# EAGLE board adafruit-flora-mainboard-2 (EAGLE 6.6.0)
REV: B
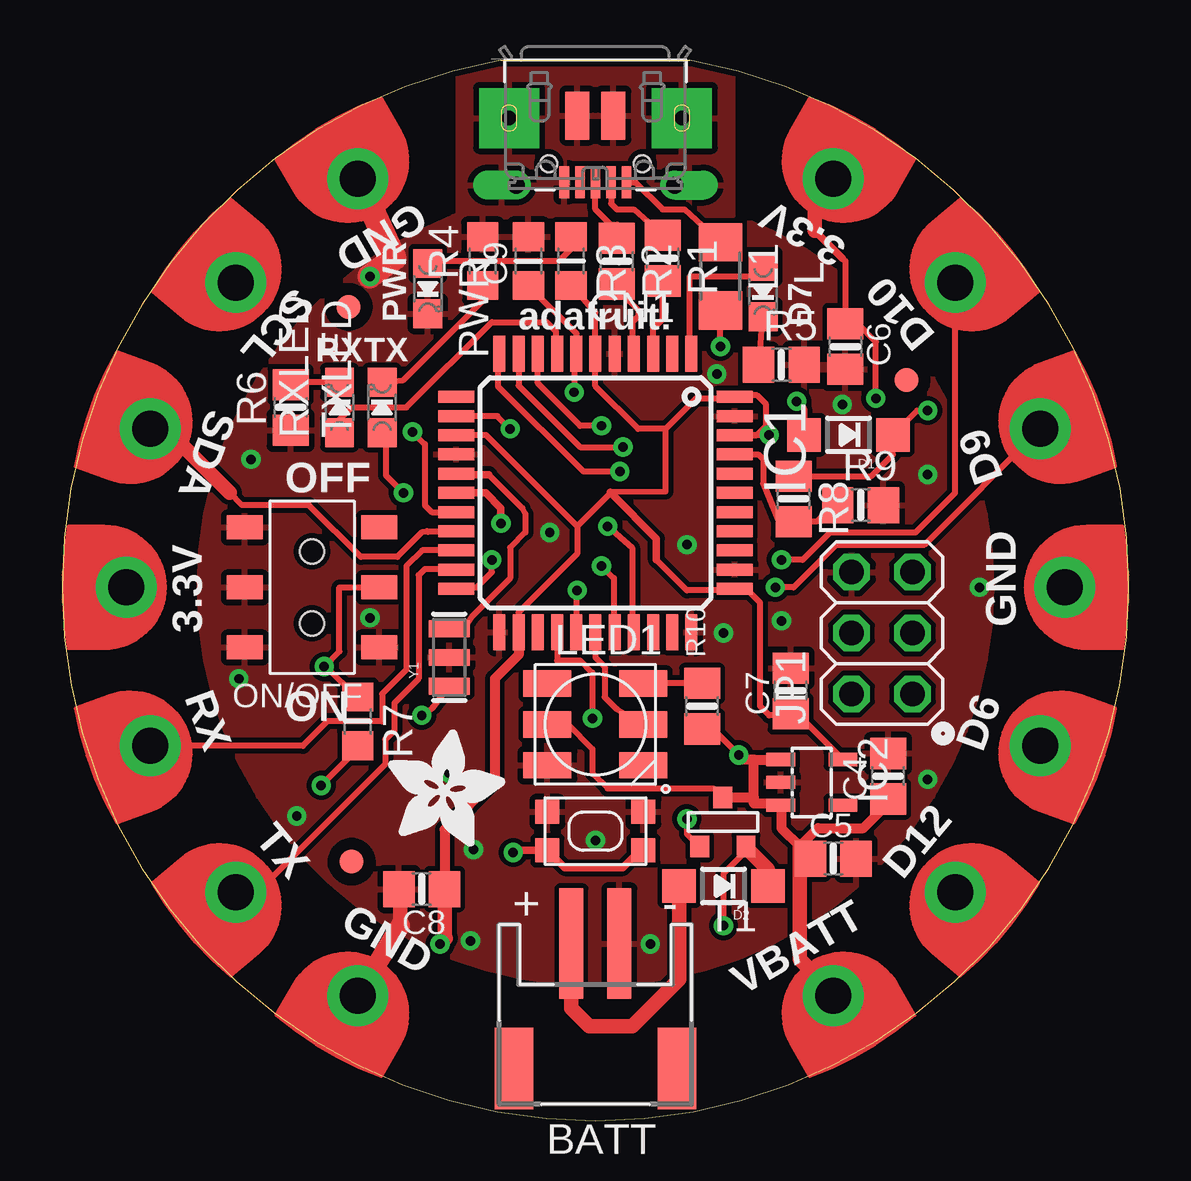
[diagram p0: board, top side]
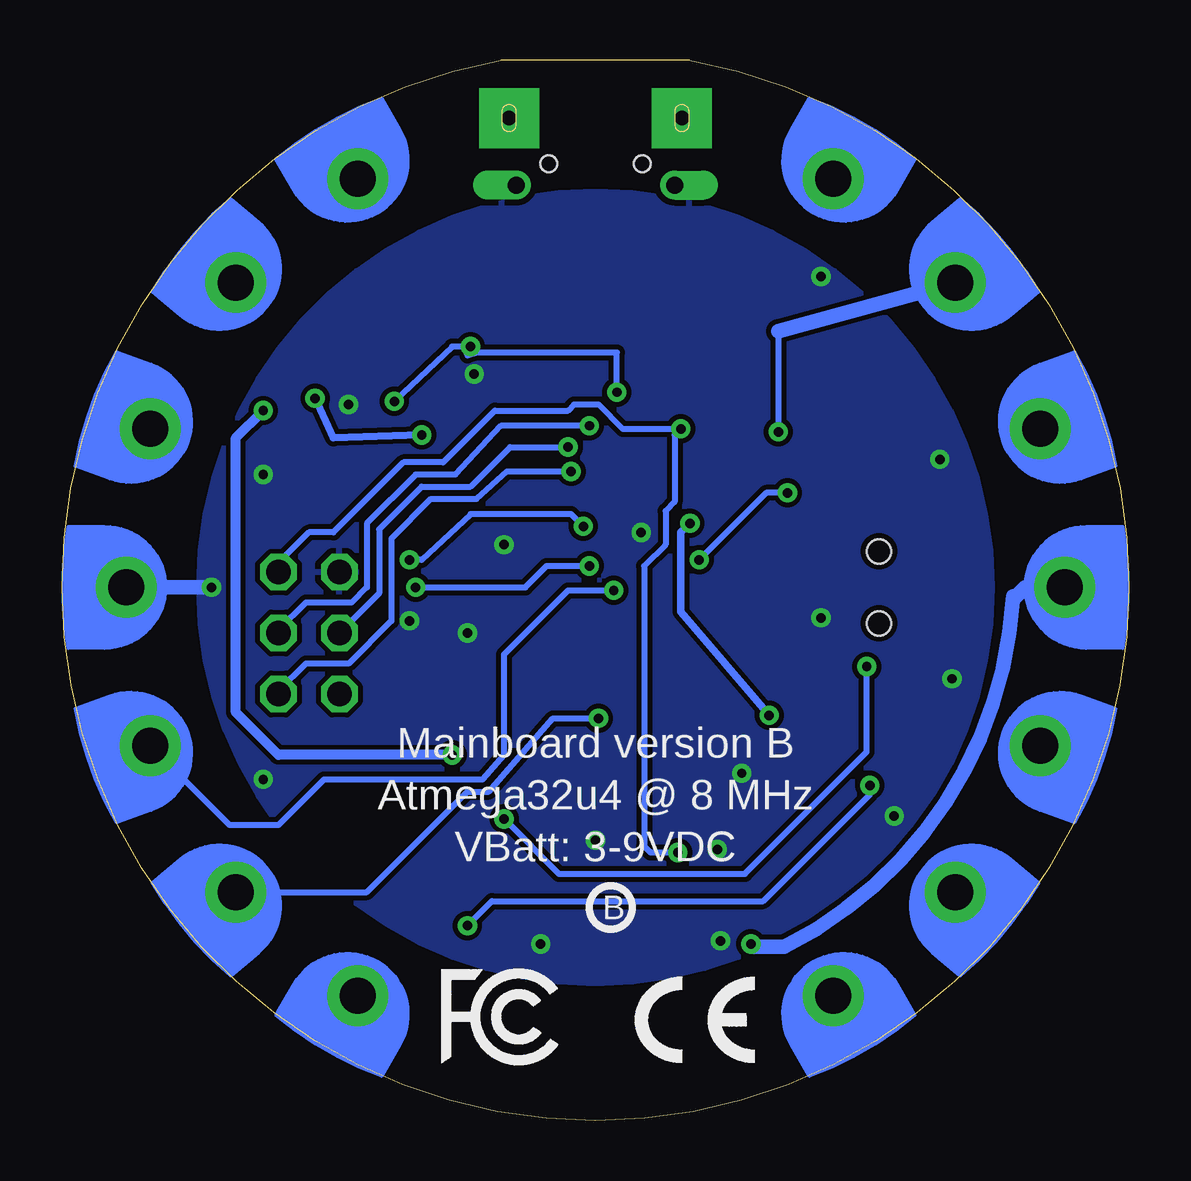
[diagram p1: board, bottom side, seen from below]

Size 44.45 x 44.2 mm. Coordinates in mm from the lower left corner, seen from the top.
Outline: 0,22.23 arc90 22.23,0 arc90 44.45,22.23 arc80 26.16,44.2 18.29,44.2 arc80 0,22.23
Copper layers (1*16): Top 0.035mm / dielectric 1.5mm / Bottom 0.035mm
Design rules "adafruit": minimum track width 8mil, minimum drill 15.5mil, track to track 8mil, track to pad 8mil, pad to pad 8mil, via to via 8mil, smd to smd 8mil, copper to edge 10mil, drill to drill 8mil, minimum pad ring 10mil, minimum via ring 8mil, stop-mask expansion 2mil, vias tented up to drill 20mil, thermal gap 10mil

## Footprints (pad centres in the part's own frame; a part is rotated, then mirrored left to right if it is on the bottom)
SEWINGTAP_2.0 = drill 1.5 pad 2.54: P$1 0,0
JST-PH-2-SMT-RA = smd 1 x 4.6: 1 1,-3.7; 2 -1,-3.7 | smd 1.6 x 3.4: NC1 -3.4,1.5; NC2 3.4,1.5
KMR2 = smd 1 x 1: 1 2,0.8; 2 2,-0.8; 3 -2,0.8; 4 -2,-0.8
0805-NO = smd 1.3 x 1.5: 1 -0.95,0; 2 0.95,0
_0805MP = smd 1.2 x 1.3: 1 -1.016,0; 2 1.016,0
4UCONN_20329 = smd 1 x 2: BASE@1 -0.75,-2; BASE@2 0.75,-2 | smd 0.4 x 1.35: D+ 0,0.775; D- -0.65,0.775; GND 1.3,0.775; ID 0.65,0.775; VBUS -1.3,0.775 | drill 0.7 offset: SPRT@1 -3.3,0.9; SPRT@2 3.3,0.9 | drill 0.6 pad 2.5 square: SPRT@3 -3.6,-1.9; SPRT@4 3.6,-1.9 | hole 0.7: -1.95,0; 1.95,0
SOD-123 = smd 1.4 x 1.4: A 1.85,0; C -1.85,0
TQFP44 = smd 1.5 x 0.5: 1 -5.8,4; 2 -5.8,3.2; 3 -5.8,2.4; 4 -5.8,1.6; 5 -5.8,0.8; 6 -5.8,0; 7 -5.8,-0.8; 8 -5.8,-1.6; 9 -5.8,-2.4; 10 -5.8,-3.2; 11 -5.8,-4; 23 5.8,-4; 24 5.8,-3.2; 25 5.8,-2.4; 26 5.8,-1.6; 27 5.8,-0.8; 28 5.8,0; 29 5.8,0.8; 30 5.8,1.6; 31 5.8,2.4; 32 5.8,3.2; 33 5.8,4 | smd 0.5 x 1.5: 12 -4,-5.8; 13 -3.2,-5.8; 14 -2.4,-5.8; 15 -1.6,-5.8; 16 -0.8,-5.8; 17 0,-5.8; 18 0.8,-5.8; 19 1.6,-5.8; 20 2.4,-5.8; 21 3.2,-5.8; 22 4,-5.8; 34 4,5.8; 35 3.2,5.8; 36 2.4,5.8; 37 1.6,5.8; 38 0.8,5.8; 39 0,5.8; 40 -0.8,5.8; 41 -1.6,5.8; 42 -2.4,5.8; 43 -3.2,5.8; 44 -4,5.8
SOT23-5L = smd 0.55 x 1.2: 1 -0.95,-1.3; 2 0,-1.3; 3 0.95,-1.3; 4 0.95,1.3; 5 -0.95,1.3
2X03 = drill 1.016 octagon: 1 -2.54,-1.27; 2 -2.54,1.27; 3 0,-1.27; 4 0,1.27; 5 2.54,-1.27; 6 2.54,1.27
CHIPLED_0805_NOOUTLINE = smd 1.2 x 1.2: A 0,-1.05; C 0,1.05
R1206 = smd 1.6 x 1.803: 1 -1.422,0; 2 1.422,0
WS2812 = smd 2 x 1.1: DI 2,0; DO 2,-1.7; LEDVDD -2,0; NC -2,1.7; VDD 2,1.7; VSS -2,-1.7
EG1390 = smd 1 x 1.5: O1 -2.5,2.8; O2 -2.5,-2.8; P1 0,2.8; P2 0,-2.8; S1 2.5,2.8; S2 2.5,-2.8 | hole 1: 1.5,0; -1.5,0
SOT-23 = smd 0.787 x 0.889: 1 0.025,-1.016; 2 -0.94,1.016; 3 0.991,1.016
FIDUCIAL_1MM = smd 1 x 1: 1 0,0
RESONATOR-SMD = smd 0.7 x 1.7: 1 -1.2,0; 2 0,0; 3 1.2,0

## Placement (x,y rotation side)
3.3VTAP  SEWTAP-2.0IN  [SEWINGTAP_2.0]  2.67,22.23 90 top
3V3TAP2  SEWTAP-2.0IN  [SEWINGTAP_2.0]  32.13,39.24 330 top
BATT  3-9VDC  [JST-PH-2-SMT-RA]  22.23,3.68 180 top
BOOT  SPST_TACT-KMR2  [KMR2]  22.23,12.07 180 top
C4  10uF  [0805-NO]  34.42,14.35 90 top
C5  10uF  [0805-NO]  32.13,10.92 0 top
C6  10uF  [0805-NO]  32.64,32.26 270 top
C7  10uF  [0805-NO]  30.35,17.91 90 top
C8  10uF  [0805-NO]  14.99,9.65 180 top
C9  10uF  [_0805MP]  19.43,35.81 90 top
CN1  MiniB USB  [4UCONN_20329]  22.23,39.88 180 top
D1  SCHOTTKY  [SOD-123]  32.77,28.58 180 top
D2  SCHOTTKY  [SOD-123]  27.56,9.78 180 top
D6  SEWTAP-2.0IN  [SEWINGTAP_2.0]  40.77,15.62 250 top
GND3TAP  SEWTAP-2.0IN  [SEWINGTAP_2.0]  12.32,39.24 30 top
GNDTAP  SEWTAP-2.0IN  [SEWINGTAP_2.0]  41.78,22.23 270 top
GNDTAP2  SEWTAP-2.0IN  [SEWINGTAP_2.0]  12.32,5.21 150 top
IC1  ATMEGA32U4-AU  [TQFP44]  22.23,26.16 270 top
IC2  MIC5225-3.3V  [SOT23-5L]  31.24,14.1 270 top
IO9  SEWTAP-2.0IN  [SEWINGTAP_2.0]  40.77,28.83 290 top
IO10  SEWTAP-2.0IN  [SEWINGTAP_2.0]  37.21,34.92 310 top
IO12  SEWTAP-2.0IN  [SEWINGTAP_2.0]  37.21,9.53 230 top
JP1  ICSP  [2X03]  34.16,20.32 90 top
L  RED  [CHIPLED_0805_NOOUTLINE]  29.21,34.54 180 top
L1  500mA  [R1206]  27.43,35.18 270 top
LED1  WS2812  [WS2812]  22.23,16.51 0 top
ON/OFF  EG1390  [EG1390]  10.41,22.23 90 top
PWR  GREEN  [CHIPLED_0805_NOOUTLINE]  15.24,34.67 180 top
R1  22  [0805-NO]  25.02,35.94 270 top
R2  22  [0805-NO]  23.11,35.81 270 top
R3  1K  [_0805MP]  21.21,35.81 270 top
R4  1K  [_0805MP]  17.53,35.81 90 top
R5  1K  [0805-NO]  29.97,31.5 0 top
R6  1K  [0805-NO]  9.53,29.72 90 top
R7  10K  [_0805MP]  12.32,16.64 270 top
R8  150K  [0805-NO]  30.48,25.91 270 top
R9  10K  [0805-NO]  33.27,25.65 0 top
R10  2.2K  [0805-NO]  26.67,17.27 90 top
RX  SEWTAP-2.0IN  [SEWINGTAP_2.0]  3.68,15.62 110 top
RXLED  YELLOW  [CHIPLED_0805_NOOUTLINE]  11.56,29.72 0 top
SCL  SEWTAP-2.0IN  [SEWINGTAP_2.0]  7.24,34.92 50 top
SDA  SEWTAP-2.0IN  [SEWINGTAP_2.0]  3.68,28.83 70 top
T1  DMG3415  [SOT-23]  27.56,12.45 180 top
TX  SEWTAP-2.0IN  [SEWINGTAP_2.0]  7.24,9.53 130 top
TXLED  YELLOW  [CHIPLED_0805_NOOUTLINE]  13.34,29.72 0 top
U$1  [ADAFRUIT_5MM]  13.59,11.43 0 top
U$2  FIDUCIAL""  [FIDUCIAL_1MM]  12.07,10.8 0 top
U$3  FIDUCIAL""  [FIDUCIAL_1MM]  11.94,33.91 0 top
U$4  [FLORAMED]  33.91,24.13 0 bottom
U$5  [PCBFEAT-REV-040]  21.59,8.89 0 bottom
U$6  FIDUCIAL""  [FIDUCIAL_1MM]  35.18,30.86 0 top
U$7  [SYMBOL_FCC_5MM]  28.7,2.29 0 bottom
U$8  [SYMBOL_CE_5MM]  20.57,2.41 0 bottom
VCC2  SEWTAP-2.0IN  [SEWINGTAP_2.0]  32.13,5.21 210 top
Y1  8MHz  [RESONATOR-SMD]  16.13,19.3 90 top

## Library data of the parts
3.3VTAP 3V3TAP2 BATT BOOT D6 GND3TAP GNDTAP GNDTAP2 IC2 IO9 IO10 IO12 L1 LED1 ON/OFF RX SCL SDA TX VCC2 = adafruit
C4-C9 CN1 D1 D2 L PWR R1-R10 RXLED TXLED U$1 U$5 U$7 U$8 = microbuilder
IC1 = adaprog
JP1 = pinhead
T1 = zetex; OC_FARNELL: unknown; OC_NEWARK: unknown
U$2 U$3 U$6 = microbuilder; BOM: EXCLUDE
U$4 = flora
Y1 = SparkFun

## Nets
+3V3: 3.3VTAP.P$1 3V3TAP2.P$1 C6.1 C7.1 C8.1 IC1.6 IC1.14 IC1.24 IC1.34 IC1.42 IC1.44 IC2.5 R3.2
+5V: C9.1 D1.A IC1.7 L1.2
A5: IC1.41 R8.2 R9.1
D0/RX: IC1.20 RX.P$1
D1/TX: IC1.21 TX.P$1
D6*: D6.P$1 IC1.27
D7: IC1.1 L.A
GND: BATT.2 BOOT.2 BOOT.4 C4.2 C5.2 C6.2 C7.2 C8.2 C9.2 CN1.BASE@1 CN1.BASE@2 CN1.GND CN1.SPRT@1 CN1.SPRT@2 CN1.SPRT@3 CN1.SPRT@4 GND3TAP.P$1 GNDTAP2.P$1 GNDTAP.P$1 IC1.5 IC1.15 IC1.23 IC1.33 IC1.35 IC1.43 IC2.2 JP1.6 LED1.VSS ON/OFF.O1 ON/OFF.O2 ON/OFF.P1 ON/OFF.S1 PWR.C R4.2 R5.2 R6.1 R9.2 Y1.2
IO9*: IC1.29 IO9.P$1
IO10*: IC1.30 IO10.P$1
IO12*: IC1.26 IO12.P$1
MISO: IC1.11 JP1.1
MOSI: IC1.10 JP1.4
N$1: PWR.A R3.1
N$2: CN1.D+ R2.1
N$3: IC1.3 R1.2
N$4: IC1.4 R2.2
N$5: CN1.D- R1.1
N$6: D2.C R7.2 T1.2
N$7: BATT.1 D2.A
N$8: IC1.17 Y1.1
N$9: IC1.16 Y1.3
N$10: L.C R5.1
N$11: R4.1 TXLED.C
N$12: R6.2 RXLED.C
N$13: ON/OFF.P2 R7.1 T1.3
N$14: LED1.VDD R10.2
N$15: IC1.25
NEOPIX: IC1.28 LED1.DI
PC6: IC1.31
PC7: IC1.32
PD0: IC1.18 SCL.P$1
PD1: IC1.19 SDA.P$1
RST: BOOT.1 BOOT.3 IC1.13 JP1.5
RXLED/SS: IC1.8 RXLED.A
SCK: IC1.9 JP1.3
TXLED: IC1.22 TXLED.A
VBUS: CN1.VBUS L1.1
VCC: C4.1 C5.1 D1.C IC2.1 IC2.3 LED1.LEDVDD R8.1 R10.1 T1.1 VCC2.P$1

## Tracks (layer width: path | path; a pad name or v marks a point on that pad's centre or on a via)
+3V3  (via drill 0.39)
  Top 0.254: IC1.14 17.67,28.56 21.46,24.77 | IC1.24 19.03,21.18 21.46,23.62 21.46,24.77 | 24.77,23.37 26.04,22.1 28.07,22.1 | 28.07,22.1 28.03,22.14 IC1.34 | 28.07,22.1 28.07,22.12 IC1.34 | 25.15,28.83 24,28.83 22.23,30.61 IC1.6 22.23,33.67 21.35,34.67 21.35,34.78 R3.2 | 25.15,28.83 26.42,30.1 28.07,30.1 28.07,30.12 IC1.44 28.09,30.23 28.96,30.23 29.34,29.85 29.34,28.96 28.94,28.56 IC1.42 28.04,28.58 v29.46,28.58 | 25.15,28.83 25.15,26.21 22.84,26.19 | 32.51,35.94 32.64,35.81 C6.1 33.15,33.21 33.91,32.45 v33.91,30.1 | 28.07,22.1 28.19,22.1 28.32,22.23 | IC2.5 30.63,16.96 C7.1 | 21.46,24.77 22.8,26.1 22.92,26.1 | 30.35,16.89 29.46,16.89 29.08,17.27 29.08,21.59 28.58,22.1 28.09,22.1 IC1.34
  Top 0.305: 22.84,26.19 22.92,26.1 24.77,24.26 24.77,23.37 | 32.51,35.94 31.37,37.08
  Top 0.406: 30.35,16.89 C7.1 | IC1.24 19.03,19.41 18.03,18.42 18.03,14.22 15.94,12.13 C8.1
  Top 0.61: 3V3TAP2.P$1 31.37,38.48 31.37,37.08 | 16,9.78 16,9.65 C8.1 15.94,7.65 15.99,7.6 v15.75,7.37
  Bottom 0.305: v29.46,28.58 33.15,28.45 v33.91,30.1
  Bottom 0.61: 3.3VTAP.P$1 4.32,22.23 4.83,21.72 4.83,21.84 arc60 14.35,7.24 15.75,7.24 v15.75,7.37
+5V  (via drill 0.39)
  Top 0.254: v27.43,32.26 L1.2 | v21.34,30.35 21.34,31.96 IC1.7 21.43,32.8 C9.1 | 30.61,28.83 D1.A 30.92,29.66 v30.61,29.97
  Bottom 0.254: v21.34,30.35 21.34,32 27.18,32 27.56,31.88 v27.43,32.26 28.19,32.26 v30.61,29.97
A5
  Top 0.254: R9.1 32.13,25.65 31.44,24.96 R8.2 30.42,25.02 29.85,25.02 29.21,26.54 29.21,27.56 29.01,27.76 IC1.41
D0/RX
  Top 0.254: IC1.20 15,23.76 14.35,23.11 14.35,18.8 13.34,17.78 13.34,16.64 11.05,16.64 10.03,15.62 RX.P$1
  Top 0.61: 3.81,15.49 RX.P$1
D1/TX
  Top 0.254: IC1.21 16.41,22.96 16.38,22.99 15.11,22.99 14.86,22.73 14.86,18.42 13.84,17.4 13.84,16.26 13.46,15.88 13.46,14.86 8.13,9.53 TX.P$1 | 8,10.54 8,10.29
  Top 0.61: 8,10.29 TX.P$1
D6*  (via drill 0.39)
  Top 0.254: IC1.27 21.43,22.14 v21.46,22.1
  Bottom 0.254: v21.46,22.1 23.37,22.1 26.04,19.43 26.04,15.24 26.92,14.22 33.53,14.22 35.43,12.32 37.47,12.32 D6.P$1 40.89,15.62
D7
  Top 0.254: IC1.1 26.18,32 26.16,32 26.16,35.18 28.83,35.18 L.A
GND  (via drill 0.39)
  Top 0.61: 14.1,8 14.1,8.13 14.1,9.65 C8.2 | GND3TAP.P$1 13.21,39.24
  Top 0.813: GNDTAP2.P$1 14.1,8.13
  Top 1.016: GND3TAP.P$1 13.84,35.94 v12.83,35.18
  Bottom 0.61: 38.48,22.23 GNDTAP.P$1
  other vias: 7.87,27.56 9.78,12.7 17.02,7.49 20.32,24.51 38.23,22.23 36.07,14.22 26.04,24 36.07,26.92 12.83,20.96 7.37,18.42 16.13,14.48 22.23,11.68 24.51,7.37 27.28,31.12 32.51,29.85 27.56,20.32 29.97,20.83 17.15,11.3
  pour Top: 22.23,5.71 arc90 38.73,22.23 arc90 22.23,38.73 arc90 5.71,22.23 arc90
  pour Bottom: 22.23,5.71 arc90 38.73,22.23 arc90 22.23,38.73 arc90 5.71,22.23 arc90
  pour Top: 16.51,44.07 16.51,37.72 27.94,37.72 27.94,44.07
IO9*  (via drill 0.39)
  Top 0.254: IO9.P$1 35.94,24 32.26,24 30.48,22.23 v29.72,22.23 | 22.99,20.45 23.11,20.19 | 22.99,20.45 IC1.29 | v22.48,23.11 22.99,22.61 22.99,20.45
  Bottom 0.254: v29.72,22.23 25.15,22.23 24.26,23.11 v22.48,23.11
IO10*  (via drill 0.39)
  Top 0.254: IO10.P$1 37.21,26.16 35.56,24.51 32,24.51 30.86,23.37 v29.97,23.37 | IC1.30 23.75,20.44 23.75,23.88 v22.73,24.77
  Bottom 0.254: v22.73,24.77 23.24,25.27 27.43,25.27 29.46,23.37 v29.97,23.37
IO12*  (via drill 0.39)
  Top 0.254: IC1.26 20.62,19.18 21.59,19.18 22.1,18.67 v22.1,16.76
  Bottom 0.254: v22.1,16.76 24,16.76 26.67,13.72 27.56,13.72 31.75,9.53 IO12.P$1
MISO  (via drill 0.39)
  Top 0.254: IC1.11 18.18,32 18.16,32 18.16,30.61 21.72,27.05 v23.24,27.05
  Bottom 0.254: JP1.1 35.43,17.91 34.29,19.05 32.51,19.05 30.73,20.83 30.73,24.26 29.08,25.91 27.18,25.91 25.91,27.05 v23.24,27.05
MOSI  (via drill 0.39)
  Top 0.254: IC1.10 19.03,30.63 21.59,28.07 v23.37,28.07
  Bottom 0.254: JP1.4 31.24,21.97 31.24,24.64 29.46,26.42 27.43,26.42 25.78,28.07 v23.37,28.07
N$1
  Top 0.254: R3.1 21.21,36.32 20.7,35.81 15.4,35.81 PWR.A
N$2
  Top 0.254: CN1.D+ 22.23,37.97 22.86,37.34 23.11,37.34 R2.1
N$3
  Top 0.254: 24.62,34.72 R1.2 25.02,33.4 24.62,33.01 IC1.3
N$4
  Top 0.254: R2.2 23.37,34.61 23.37,34.42 24,33.78 24,33.53 23.75,33.27 23.75,32.04 IC1.4
N$5
  Top 0.254: R1.1 24.89,36.96 | 24.89,37.34 R1.1 | CN1.D- 22.88,38.21 23.11,37.97 23.81,37.97 R1.1
N$6  (via drill 0.39)
  Top 0.254: 27.56,9.91 27.53,9.91 | 27.56,9.91 v27.56,8.13 | 27.56,9.91 27.56,10.29 28.58,11.3 | v10.8,13.97 12.32,15.49 R7.2
  Top 0.61: 29.46,9.78 D2.C 29.41,10.47 28.58,11.3 28.5,11.38 T1.2
  Bottom 0.254: v27.56,8.13 26.54,9.14 15.24,9.14 10.8,13.59 v10.8,13.97
N$7
  Top 0.61: BATT.1 21.23,4.68 21.97,3.94 23.75,3.94 25.71,5.9 D2.A
N$8  (via drill 0.39)
  Top 0.254: v14.99,16.89 15.44,17.22 Y1.1
  Top 0.305: v18.29,24.89 18.29,25.53 17.65,26.16 IC1.17
  Bottom 0.305: v14.99,16.89 18.67,21.21 18.67,24.51 v18.29,24.89
N$9
  Top 0.254: 17.78,26.92 19.18,25.53 19.3,25.27 19.3,24.51 18.67,23.88 18.67,22.61 17.11,21.05 16.73,20.49 Y1.3
  Top 0.305: IC1.16 16.47,26.96 16.51,26.92 17.78,26.92
N$10
  Top 0.254: L.C 29.16,33.31 29.16,33.26 R5.1
N$11
  Top 0.254: 13.37,30.73 TXLED.C 14.22,30.86 17.53,34.16 R4.1
N$12
  Top 0.254: RXLED.C 9.56,30.77
  Top 0.305: R6.2 9.53,30.73 9.56,30.77
N$13  (via drill 0.39)
  Top 0.254: 12.7,22.23 11.56,22.23 11.56,19.56 v10.92,18.92 10.98,18.92 R7.1 | T1.3 26.54,11.43 26.04,11.94 v26.04,12.57
  Top 0.406: 12.7,22.23 ON/OFF.P2
  Bottom 0.254: v26.04,12.57 23.75,10.29 16,10.29 10.92,15.37 v10.92,18.92
N$14
  Top 0.254: R10.2 24.24,18.22 LED1.VDD
NEOPIX
  Top 0.254: IC1.28 22.23,19.3 22.61,18.92 22.61,17.65 23.11,17.15 LED1.DI
PD0  (via drill 0.39)
  Top 0.254: IC1.18 15.41,25.36 15.11,25.65 15.11,28.19 v14.61,28.7
  Bottom 0.254: 14.61,32.89 v14.61,28.7
  Bottom 0.61: SCL.P$1 14.61,32.89
PD1
  Top 0.254: 6.99,26.16 7.49,25.65 10.29,25.65 12.45,23.5 13.97,23.5 14.99,24.51 15.24,24.54 15.22,24.56 IC1.19
  Top 0.61: SDA.P$1 3.68,28.7 4.45,28.7 6.99,26.16
RST  (via drill 0.39)
  Top 0.254: IC1.13 18.14,29.36 v18.67,28.83 | v18.8,11.18 18.92,11.3
  Top 0.305: BOOT.1 20.95,10.54 23.37,10.54 24.09,11.27 BOOT.3 24.26,11.27 24.26,11.18 | BOOT.1 20.07,11.27 | BOOT.1 18.8,11.27 v18.8,11.18
  Top 0.406: 20.07,11.27 20.07,11.43
  Bottom 0.254: JP1.5 35.56,22.73 35.56,23.11 34.16,24.51 33.15,24.51 30.23,27.43 28.58,27.43 26.42,29.59 23.37,29.59 23.11,29.85 22.1,29.85 21.08,28.83 v18.67,28.83 | v18.67,28.83 18.67,29.08 | v18.67,28.83 18.92,28.58 18.92,25.78 19.3,25.4 19.3,24 20.19,23.11 20.19,11.43 19.94,11.18 v18.8,11.18
RXLED/SS
  Top 0.254: 20.57,32.01 20.57,32.89 20.19,33.27 17.91,33.27 14.35,29.72 12.07,29.72 11.56,29.21 RXLED.A
  Top 0.305: 20.57,32.01 IC1.8
SCK  (via drill 0.39)
  Top 0.254: IC1.9 19.83,30.72 21.59,28.96 v22.48,28.96
  Bottom 0.254: JP1.3 35.43,20.45 34.29,21.59 32.39,21.59 31.75,22.23 31.75,24.89 29.72,26.92 28.07,26.92 26.16,28.96 v22.48,28.96
TXLED  (via drill 0.39)
  Top 0.254: TXLED.A 13.5,28.67 | 13.5,28.67 13.46,28.7 | IC1.22 16.38,22.2 16.38,22.23 17.27,22.23 17.91,22.86 v17.91,23.37 | 13.5,28.67 13.5,26.89 v14.22,26.16
  Bottom 0.254: v17.91,23.37 15.11,26.16 v14.22,26.16
VBUS
  Top 0.254: CN1.VBUS 23.89,39.1 25.02,37.97 25.93,37.97 L1.1
  Top 0.305: 27.43,36.32 L1.1
VCC  (via drill 0.39)
  Top 0.254: 30.73,11.05 31.05,11.05 C5.1 | 29.97,13.21 29.94,13.18 IC2.3 | R8.1 33.72,26.86 34.62,27.76 D1.C 35.63,29.59 v36.07,29.59 | R10.1 27.11,16.32 v28.19,15.24 | LED1.LEDVDD 21.08,16.51 22.1,15.49 22.1,14.48 22.73,13.84 27.15,13.84 T1.1
  Top 0.406: 28.83,15.05 28.19,15.05 v28.19,15.24 | 28.83,15.05 IC2.1 | 30.1,13.21 29.97,13.21 | 29.97,13.21 28.83,13.21 28.83,13.46 | 28.83,13.46 28.83,15.05 | 29.97,13.21 29.97,12.19 30.73,11.43 31.5,12.19 33.39,12.19 34.42,13.22 C4.1 | 28.83,13.46 T1.1
  Top 0.61: VCC2.P$1 32.13,5.33 30.73,6.73 30.73,11.05 30.73,11.43
  Bottom 0.406: v28.19,15.24 35.43,15.24 37.21,17.02 37.21,28.45 v36.07,29.59

## Text on the board
tPlace: GND | 3.3V | SCL | D7 | PWR | adafruit! | D10 | RX | TX | SDA | D9 | OFF | 3.3V | GND | D6 | RX | ON | D12 | TX | VBATT | GND
bPlace: Mainboard version B | Atmega32u4 @ 8 MHz | VBatt: 3-9VDC